# Altium PCB QY-PLC-20200726.PcbDoc (part 3 of 5)
Units mm, origin at the board's own origin, x right, y up, seen from the top; angles counter-clockwise.
Board outline 190.88 x 117.47 mm, 2 copper layers (Top Layer, Bottom Layer); 405 components, 307 nets, 1341 pads, 251 vias.
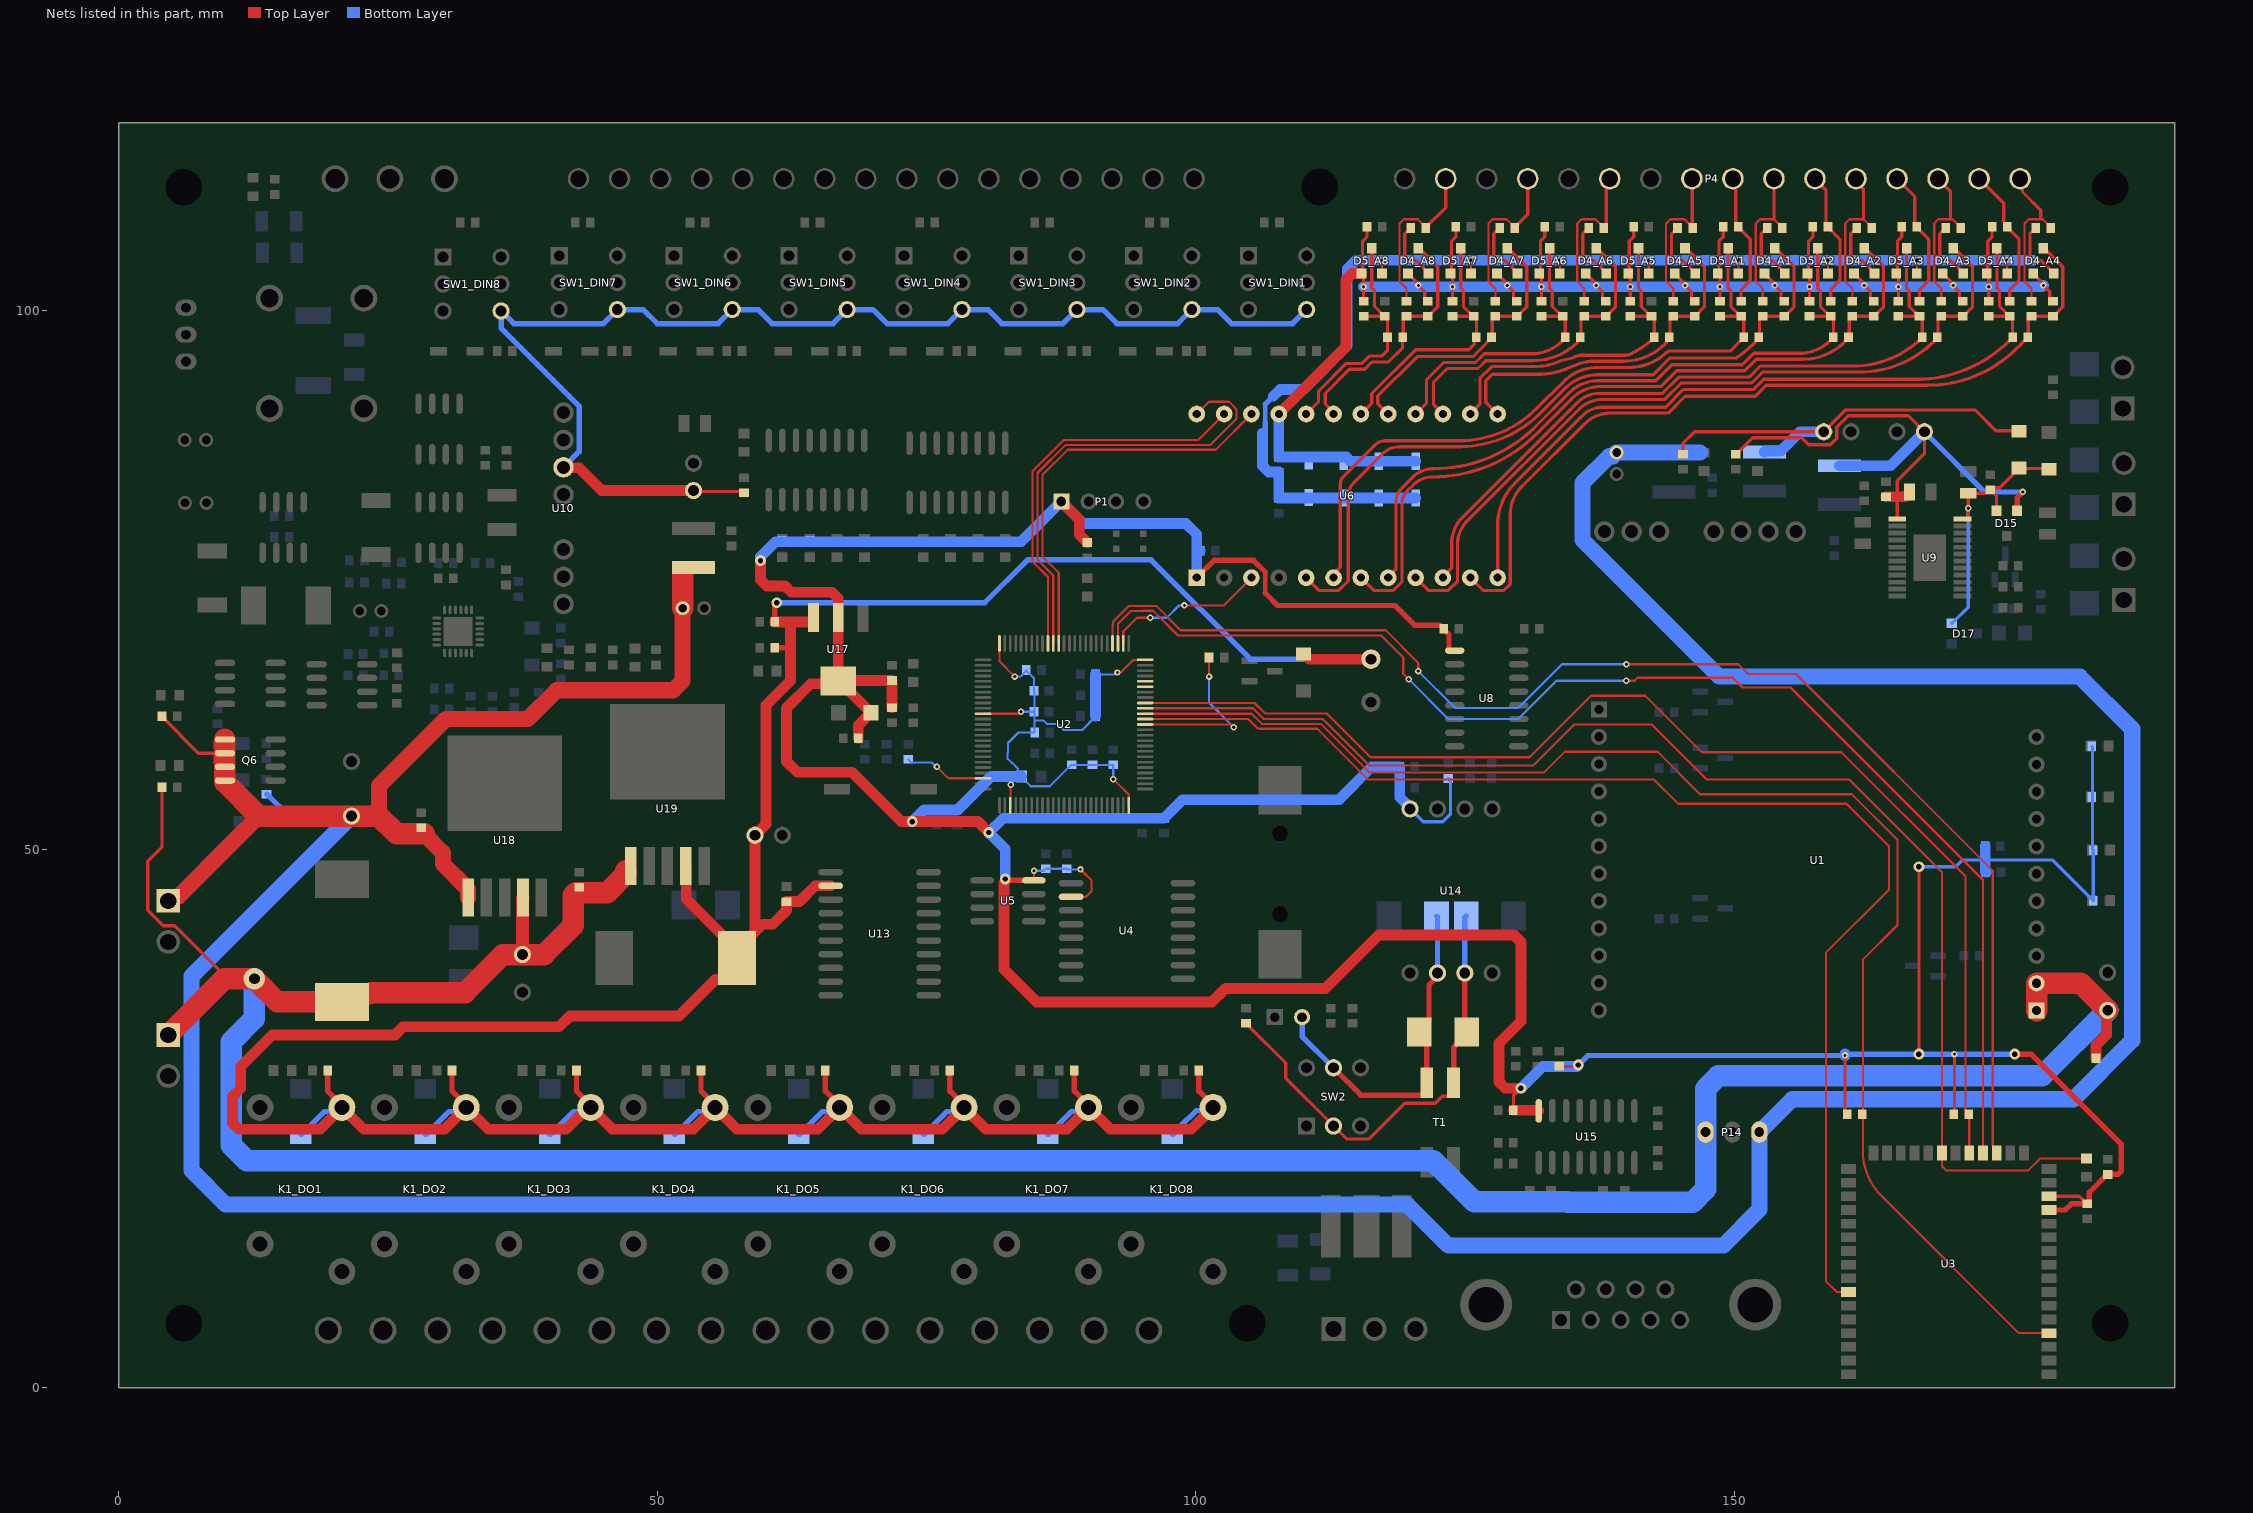
[diagram p2: the nets of this part, all layers, seen from the top]

## Via types
v1: diameter 0.6, hole 0.3, Top Layer to Bottom Layer, 163 vias
v2: diameter 0.8, hole 0.4, Top Layer to Bottom Layer, 40 vias
v3: diameter 1, hole 0.5, Top Layer to Bottom Layer, 30 vias
v4: diameter 1.27, hole 0.711, Top Layer to Bottom Layer, 11 vias
v5: diameter 1.5, hole 1, Top Layer to Bottom Layer, 4 vias
v6: diameter 2, hole 1.5, Top Layer to Bottom Layer, 2 vias
v7: diameter 2, hole 1, Top Layer to Bottom Layer, 1 vias

## Nets (pads, with @x,y where several pads share a name; then routed paths per layer and width w, separated by ;. In a path a pad name is that pad's centre, name@x,y a point inside that pad or via, vN(x,y) a via of type N, cw(c..) or ccw(c..) an arc to the next point about the centre after c; other vN are vias at no path point) (continued)
CH_L2: (continued)
  Top Layer w0.3: U6.8@117.856,75.224 117.856,75.276 118.572,75.992 118.572,79.411 ; 118.572,79.413 118.572,82.205 118.572,82.207 cw(c120.516,82.207) 119.142,83.582 120.073,84.513 cw(c122.078,82.51) 122.076,85.344 ccw(c122.078,98.708) 131.529,89.259 134.678,92.409 cw(c138.99,88.101) 134.984,92.695 134.989,92.698 cw(c136.683,90.608) 135.376,92.96 135.449,93.001 135.455,93.006 cw(c137.354,89.735) 137.134,93.512 137.262,93.512 137.268,93.518 142.688,93.518 144.166,94.996 150.72,94.996 151.782,96.058 156.048,96.058 ; 156.049,96.058 ccw(c156.049,100.08) 158.893,97.236 158.943,97.236 159.193,97.486 C22_A2.2@159.193,97.536 159.193,99.253 159.068,99.378 159.014,99.378 R25_A2.1@158.889,99.503 ; C23_A2.1@156.972,99.503 R25_A2.1@158.889,99.503 ; D5_A2.3@157.734,105.823 157.734,102.108 157.988,101.854 157.988,100.404 R25_A2.1@158.889,99.503 ; R25_A2.1@158.939,99.503 R25_A2.1@158.889,99.503
CH_L3: C22_A3.2 C23_A3.1 D5_A3.3 R25_A3.1 U6.10 | length 66.2
  Top Layer w0.3: U6.10@122.936,75.224 122.936,75.342 123.743,76.149 123.743,78.382 123.743,78.384 cw(c127.215,78.384) 124.761,80.841 135.403,91.483 cw(c137.445,89.443) 137.445,92.329 143.319,92.329 144.843,93.853 151.363,93.853 152.379,94.869 161.008,94.869 ; 161.009,94.869 ccw(c161.009,103.975) C22_A3.2@167.448,97.536 167.448,99.253 167.323,99.378 167.269,99.378 R25_A3.1@167.144,99.503 ; C23_A3.1@165.227,99.503 R25_A3.1@167.144,99.503 ; D5_A3.3@165.989,105.823 165.989,102.108 166.243,101.854 166.243,100.404 R25_A3.1@167.144,99.503 ; R25_A3.1@167.194,99.503 R25_A3.1@167.144,99.503
CH_L4: C22_A4.2 C23_A4.1 D5_A4.3 R25_A4.1 U6.12 | length 71.3
  Top Layer w0.3: U6.12@128.016,75.224 128.016,80.074 ; 128.016,80.075 cw(c133.684,80.075) 129.677,84.084 135.821,90.228 cw(c137.826,88.225) 137.826,91.059 143.616,91.059 145.267,92.71 151.786,92.71 152.721,93.645 166.859,93.645 ; 166.861,93.645 ccw(c166.861,105.905) 175.53,97.236 175.58,97.236 175.83,97.486 C22_A4.2@175.83,97.536 175.83,99.253 175.705,99.378 175.651,99.378 R25_A4.1@175.526,99.503 ; C23_A4.1@173.609,99.503 R25_A4.1@175.526,99.503 ; D5_A4.3@174.371,105.823 174.371,102.108 174.625,101.854 174.625,100.404 R25_A4.1@175.526,99.503 ; R25_A4.1@175.576,99.503 R25_A4.1@175.526,99.503
CH_L5: C22_A5.2 C23_A5.1 D5_A5.3 R25_A5.1 U6.14 | length 31.9
  Top Layer w0.3: U6.14@125.476,90.424 126.365,91.313 126.365,93.726 127.462,94.823 131.528,94.823 131.532,94.827 ccw(c131.299,101.249) 132.049,94.867 cw(c132.084,94.569) 132.084,94.869 ccw(c132.082,97.037) 132.798,94.991 ccw(c132.362,96.237) 132.851,95.011 cw(c132.962,94.732) 132.888,95.023 ccw(c131.299,101.249) 133.909,95.377 133.936,95.383 134.954,95.626 cw(c136.531,92.503) 134.984,95.641 cw(c136.531,92.503) 135.636,95.885 139.764,95.885 ccw(c139.76,100.595) 140.096,95.897 ccw(c140.075,96.196) 140.195,95.921 ccw(c137.075,103.017) 142.553,97.533 C22_A5.2@142.556,97.536 142.556,99.253 142.431,99.378 142.377,99.378 R25_A5.1@142.252,99.503 ; C23_A5.1@140.335,99.503 R25_A5.1@142.252,99.503 ; D5_A5.3@141.097,105.823 141.097,102.108 141.351,101.854 141.351,100.404 R25_A5.1@142.252,99.503 ; R25_A5.1@142.302,99.503 R25_A5.1@142.252,99.503
CH_L6: C22_A6.2 C23_A6.1 D5_A6.3 R25_A6.1 U6.16 | length 28.9
  Top Layer w0.3: U6.16@120.396,90.424 121.412,91.44 121.412,93.599 123.017,95.204 125.959,95.204 126.767,96.012 131.106,96.012 ; 131.108,96.012 ccw(c131.108,100.175) 133.972,97.154 133.975,97.157 134.051,97.233 134.051,97.286 C22_A6.2@134.301,97.536 134.301,99.253 134.176,99.378 134.122,99.378 R25_A6.1@133.997,99.503 ; C23_A6.1@132.08,99.503 R25_A6.1@133.997,99.503 ; D5_A6.3@132.842,105.823 132.842,102.108 133.096,101.854 133.096,100.404 R25_A6.1@133.997,99.503 ; R25_A6.1@134.047,99.503 R25_A6.1@133.997,99.503
CH_L7: C22_A7.2 C23_A7.1 D5_A7.3 R25_A7.1 U6.18 | length 25.3
  Top Layer w0.3: U6.18@115.316,90.424 116.332,91.44 116.332,92.329 120.396,96.393 125.349,96.393 125.857,96.901 125.857,97.347 C22_A7.2@126.046,97.536 126.046,99.253 125.921,99.378 125.867,99.378 R25_A7.1@125.742,99.503 ; C23_A7.1@123.825,99.503 R25_A7.1@125.742,99.503 ; D5_A7.3@124.587,105.823 124.587,102.108 124.841,101.854 124.841,100.404 R25_A7.1@125.742,99.503 ; R25_A7.1@125.792,99.503 R25_A7.1@125.742,99.503
CH_L8: C22_A8.2 C23_A8.1 D5_A8.3 R25_A8.1 U6.20 | length 22.7
  Top Layer w0.3: U6.20@110.236,90.424 111.379,91.567 111.379,92.534 113.968,95.123 115.428,95.123 116.109,95.804 117.267,95.804 117.791,96.328 C22_A8.2@117.791,97.536 117.791,99.253 117.666,99.378 117.612,99.378 R25_A8.1@117.487,99.503 ; C23_A8.1@115.57,99.503 R25_A8.1@117.487,99.503 ; D5_A8.3@116.332,105.823 116.332,102.108 116.586,101.854 116.586,100.404 R25_A8.1@117.487,99.503 ; R25_A8.1@117.537,99.503 R25_A8.1@117.487,99.503
CH_L_C1: P4.8 R25_A1.2 R26_A1.1 | length 12.1
  Top Layer w0.3: P4.8@149.86,112.268 150.121,112.007 R26_A1.1@150.121,108.073 ; R26_A1.1@150.371,107.873 R26_A1.1@150.371,107.823 150.371,107.773 151.477,106.667 151.477,102.833 150.622,101.978 R25_A1.2@150.622,100.903
CH_L_C2: P4.6 R25_A2.2 R26_A2.1 | length 12.5
  Top Layer w0.3: P4.6@157.48,112.268 158.496,111.252 R26_A2.1@158.496,108.015 ; R26_A2.1@158.688,107.873 R26_A2.1@158.688,107.823 158.688,107.773 159.794,106.667 159.794,102.833 158.939,101.978 R25_A2.2@158.939,100.903
CH_L_C3: P4.4 R25_A3.2 R26_A3.1 | length 12.7
  Top Layer w0.3: P4.4@165.1,112.268 166.751,110.617 R26_A3.1@166.751,108.015 ; R26_A3.1@166.943,107.873 R26_A3.1@166.943,107.823 166.943,107.773 168.049,106.667 168.049,102.833 167.194,101.978 R25_A3.2@167.194,100.903
CH_L_C4: P4.2 R25_A4.2 R26_A4.1 | length 12.7
  Top Layer w0.3: P4.2@172.72,112.268 175.006,109.982 175.006,108.299 ; R26_A4.1@175.325,107.873 R26_A4.1@175.325,107.823 175.325,107.773 176.431,106.667 176.431,102.833 175.576,101.978 R25_A4.2@175.576,100.903